# Altium PCB Ikic_PCB.PcbDoc
Units mil, origin at the board's own origin, x right, y up, seen from the top; angles counter-clockwise.
Board outline 7160 x 9700 mil, 2 copper layers (Top Layer, Bottom Layer); 47 components, 36 nets, 175 pads, 22 vias.
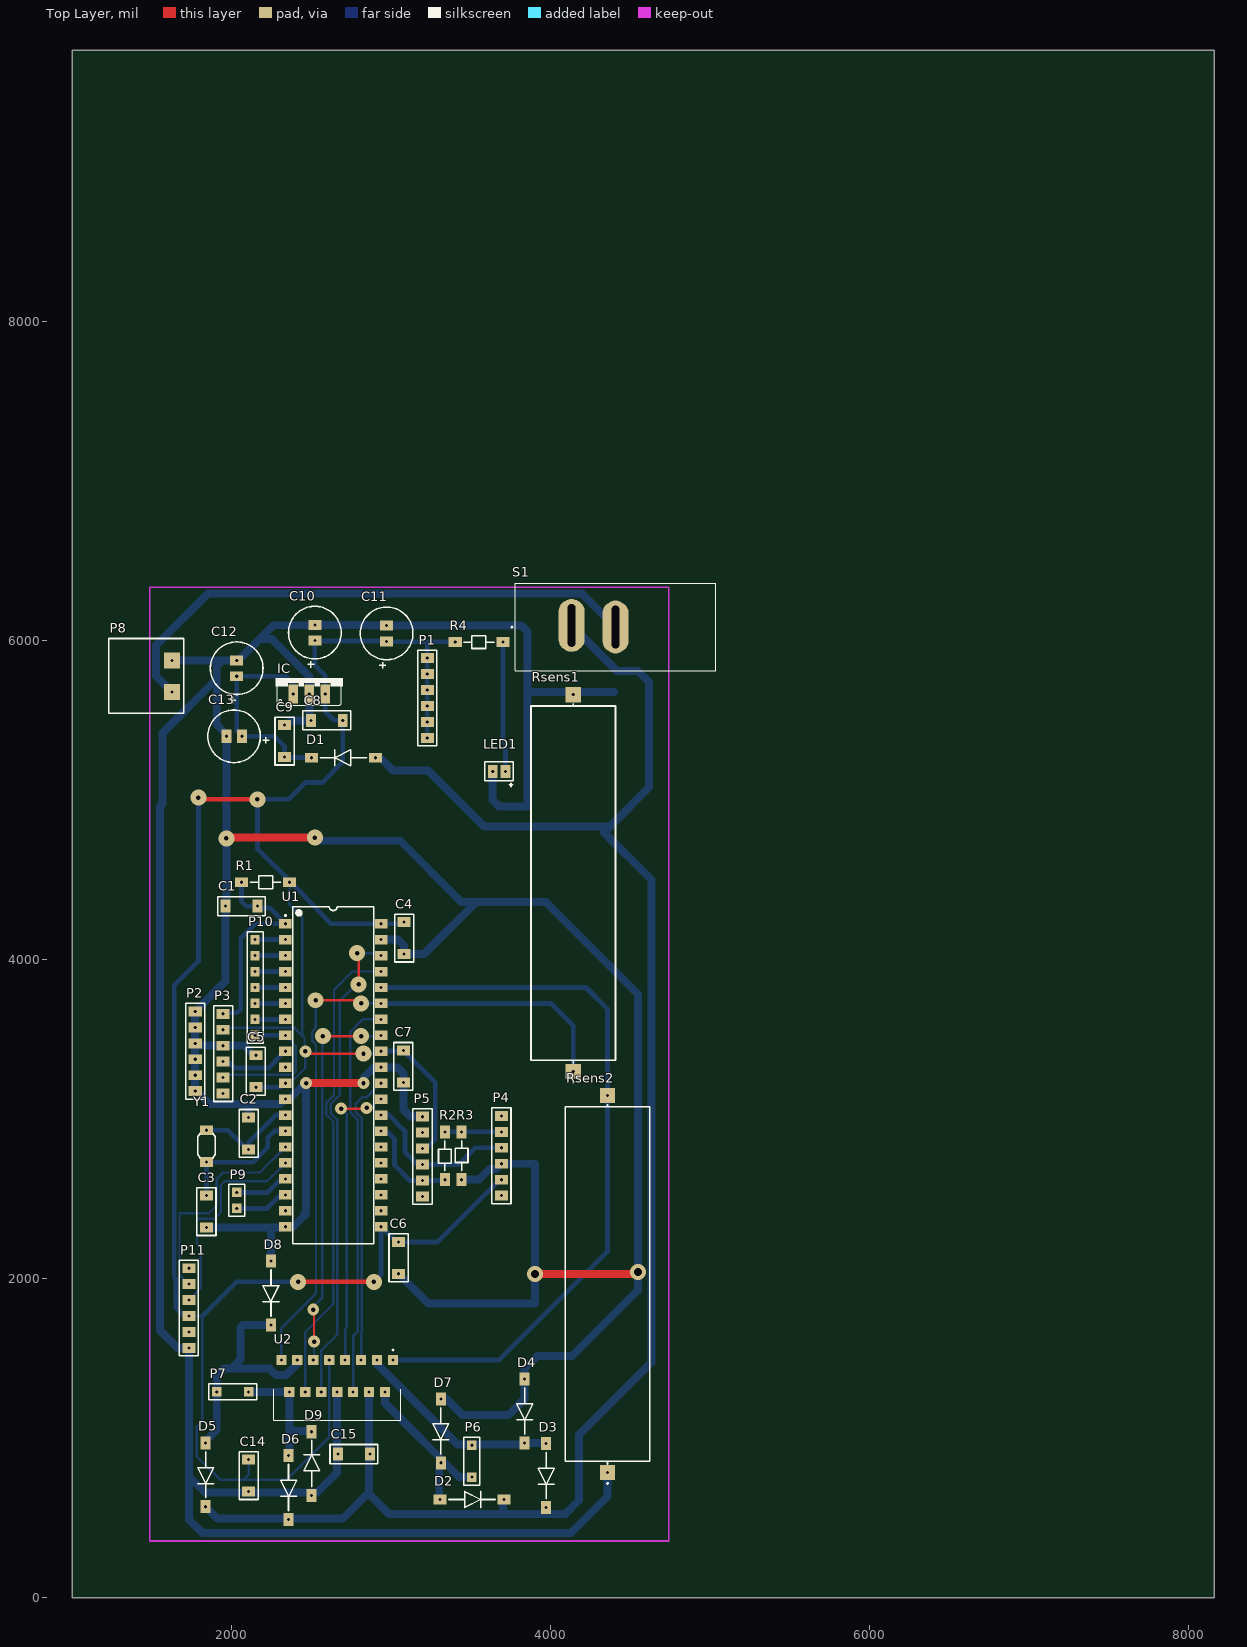
[diagram p0: Top Layer view]
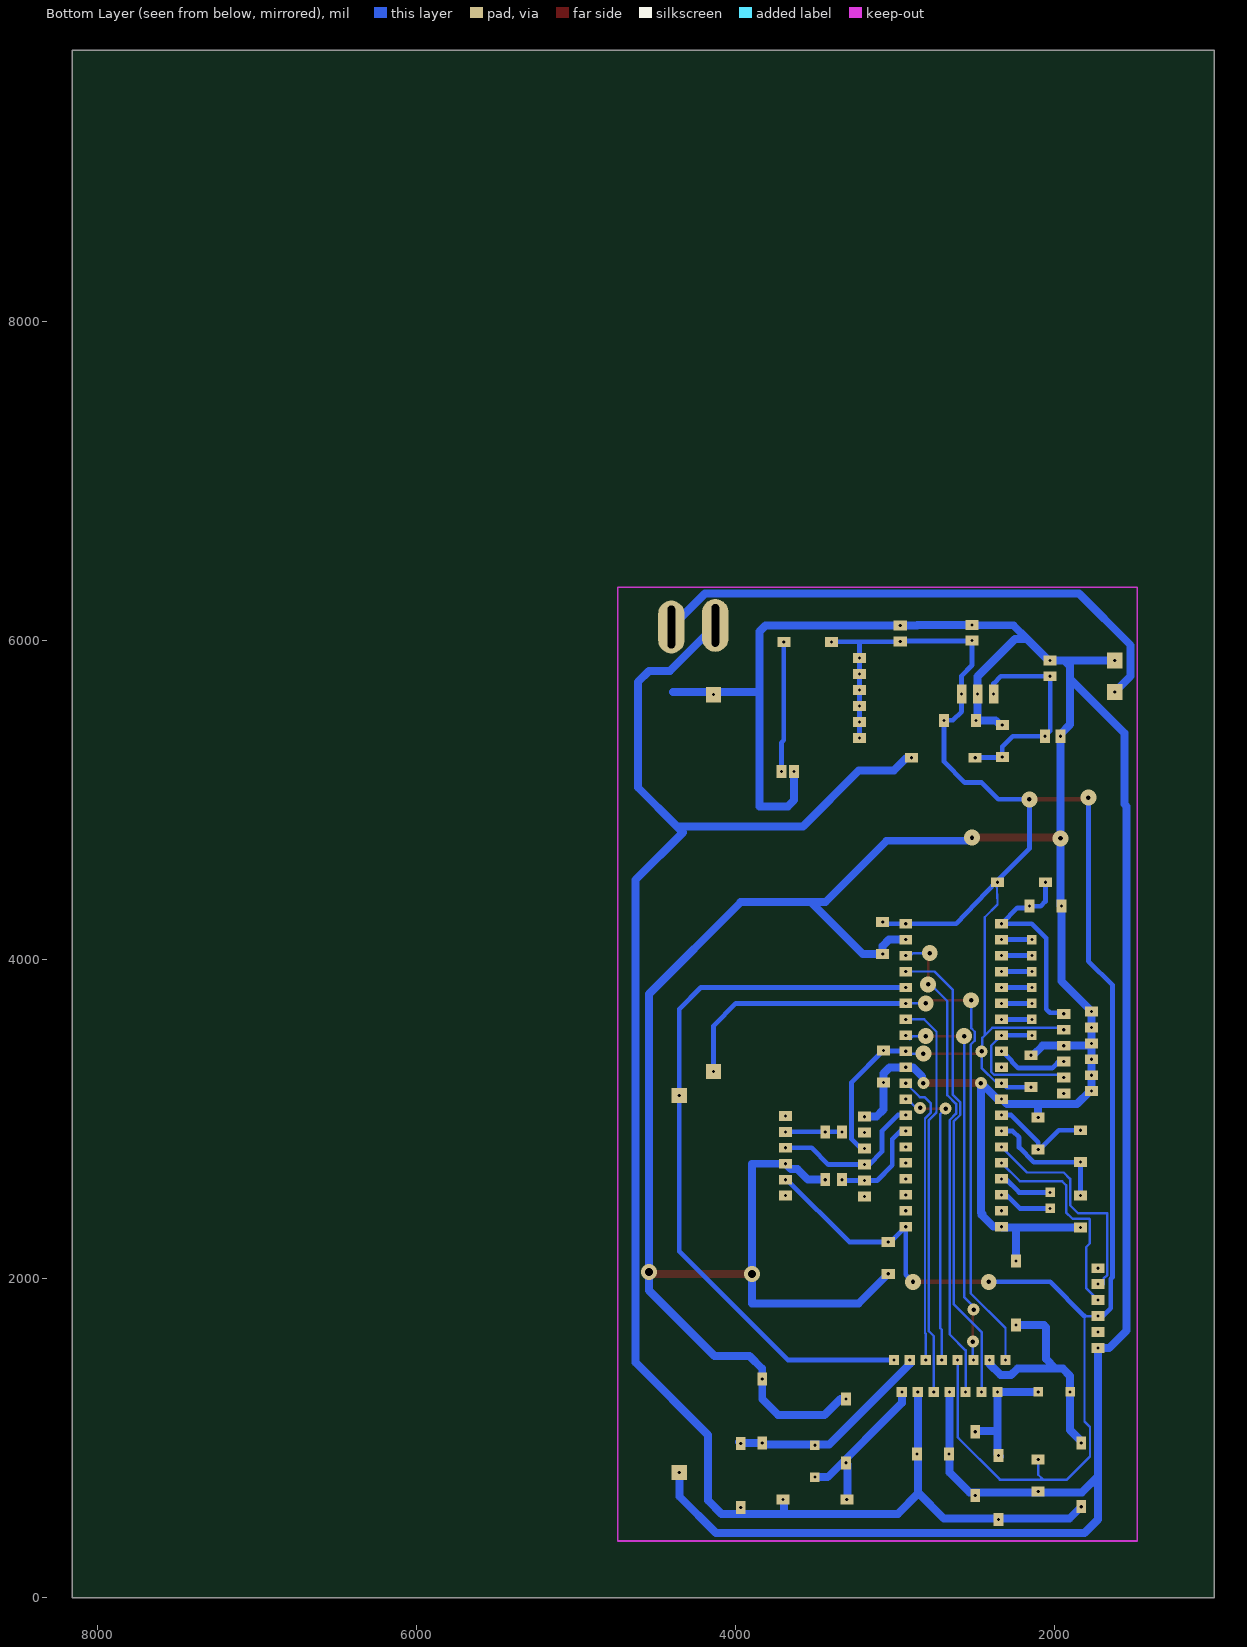
[diagram p1: Bottom Layer view, seen from below]

## Layer stack, top to bottom
Top Solder: solder mask 0.4, Solder Resist, Dk 3.5
Top Layer: signal copper 1.4
Dielectric 1: dielectric 12.6, FR-4, Dk 4.8
Bottom Layer: signal copper 1.4
Bottom Solder: solder mask 0.4, Solder Resist, Dk 3.5

## Board outline
1000,0 8160,0 8160,9700 1000,9700

## Design rules (kind name [scope] priority, off if disabled: settings)
Clearance [All] p1: gap=10 ignorepadtopadclearanceinfootprint=FALSE except(0: Arc-Hole Track-Hole SMDPad-Hole THPad-Hole Via-Hole Fill-Hole Poly-Hole Region-Hole Text-Hole)
PolygonConnect [All] p1: connectstyle=Relief reliefconductorwidth=10 reliefentries=4 polygonreliefangle="90 Angle" airgapwidth=10
RoutingVias [All] p1: holewidth=28 width=50 viastyle="Through Hole" minholewidth=28 minwidth=50 maxholewidth=28 maxwidth=50
SolderMaskExpansion [All] p1: expansion=4
Width Signal [InNetClass('Signal class')] p1: maxlimit=30 minlimit=15 preferedwidth=30 minimp=50.000000 maximp=50.000000 favimp=50.000000
Width Power [InNetClass('Power Class')] p2: maxlimit=55 minlimit=50 preferedwidth=50 bottomlayer_maxwidth=50 minimp=50.000000 maximp=50.000000 favimp=50.000000
30 further rules are at their usual default settings.

## Classes and differential pairs
net class "Signal class": +5 INT0 INT2 MCLR NetC9_2 NetLED1_1 NetP4_5 OSC1 OSC2 PGC PGD PWM1 PWM2 RB0 RB1 RB2 RB3 RB4 RB5 RB9 RB10 RB11 RB12 RF0 RF1 U1ARX U1ATX U2RX U2TX
net class "Power Class": GND NetP8_2 OUT1 OUT2 OUT3 OUT4 VCC

## Components (designator, comment, footprint, x,y, rotation, side; value= is the part's Value field where it differs from the comment)
C1 "Cap" CAP200 1960,4335 r0 top value=100nF
C2 "Cap" CAP200 2105,3010 r270 top value=33pF
C3 "Cap" CAP200 1840,2320 r90 top value=33pF
C4 "Cap" CAP200 3080,4035 r90 top value=100nF
C5 "Cap" CAP200 2150,3400 r270 top value=100nF
C6 "Cap" CAP200 3045,2030 r90 top value=100nF
C7 "Cap" CAP200 3075,3230 r90 top value=100nF
C8 "Cap" CAP200 2495,5500 r0 top value=100nF
C9 "Cap" CAP200 2330,5470 r270 top value=100nF
C10 "Cap Pol1" RAD4 2520,6000 r90 top value=470uF
C11 "Cap Pol1" RAD4 2970,5995 r90 top value=470uF
C12 "Cap Pol1" RAD4 2030,5776.57 r90 top value=470uF
C13 "Cap Pol1" RAD4 2063.43,5400 r180 top value=470uF
C14 "Cap" CAP200 2105,665 r90 top value=100nF
C15 "Cap" CAP200 2665,900 r0 top value=100nF
D1 "Diode 1N4007" DIODE400 2710,5265 r0 top
D2 "Diode 1N5402" DIODE400 3495,615 r180 top
D3 "Diode 1N5402" DIODE400 3970,775 r90 top
D4 "Diode 1N5402" DIODE400 3835,1180 r90 top
D5 "Diode 1N5402" DIODE400 1835,780 r90 top
D6 "Diode 1N5402" DIODE400 2355,700 r90 top
D7 "Diode 1N5402" DIODE400 3310,1055 r90 top
D8 "Diode 1N5402" DIODE400 2245,1920 r90 top
D9 "Diode 1N5402" DIODE400 2500,830 r270 top
IC "L7805" 78XXS 2485,5765 r0 top
LED1 "GREEN" LED_2 3675,5165 r180 top
P1 "5V" HEADER_6 3225,5640 r0 top
P2 "GND" HEADER_6 1770,3425 r0 top
P3 "Programator" HEADER_6 1945,3410 r0 top
P4 "Bluetooth" HEADER_6 3690,2770 r180 top
P5 "FT232" HEADER_6 3195,2765 r180 top
P6 "Motor 1" HDR1X2 3505,755 r0 top
P7 "Motor 2" HDR1X2 1905,1290 r270 top
P8 "2EDGRC-5.08-02P-14-00A(H)" PWR_Con 1465,5760 r180 top
P9 "Interrupt" HDR1X2_1 2030,2540 r180 top
P10 "GPIO" HDR1X7 2145,4125 r270 top
P11 "FT232" HEADER_6 1730,1815 r0 top
R1 "Res1" RES400 2210,4485 r0 top value=10K
R2 "Res1" RES400 3335,2770 r270 top value=4.7K
R3 "Res1" RES400 3440,2770 r90 top value=10K
R4 "Res1" RES400 3550,5990 r180 top value=1K
Rsens1 "15W" Rsens 4140,4480 r90 top value=5
Rsens2 "15W" Rsens 4355,1966.1 r90 top value=5
S1 "" SW_RB141C1100 4405,6085 r180 top
U1 "DSPIC30F4013-20I/P" PDIP600-P40 2635,3275 r0 top
U2 "L298N" TO127P2020X500X2100-15 3010,1490 r270 top
Y1 "XTAL" OSC_5 1840,2845 r0 top

## Footprints (in the part's own frame and the unit in brackets; to place one, negate y for a bottom-side part, rotate by r counter-clockwise, add the part's x,y. Pads: shape width x height; smd on the part's side, far side on the other; paste and mask are expansions set on the pad)
78XXS [mil]
  rect 60x120 hole 19.68: GND(0,-100) IN(-100,-100) OUT(100,-100)
  silkscreen extent -210,-170 210,0
CAP200 [mil]
  rect 62x82 hole 19.68: 1(0,0) 2(200,0)
  silkscreen extent -50,-60 250,60
DIODE400 [mil]
  rect 82x62 hole 19.68: 1(190,0) 2(-210,0)
  silkscreen extent -155,-50 135,50
HDR1X2 [mm]
  rect 1.5x1.5 hole 0.5: 1(0,0) 2(0,5.08)
  silkscreen extent -1.27,-1.27 1.27,6.35
HDR1X2_1 [mm]
  rect 1.5x1.5 hole 0.5: 1(0,0) 2(0,2.54)
  silkscreen extent -1.27,-1.27 1.27,3.81
HDR1X7 [mm] "Connector; Header; 7 Position"
  rect 1.5x1.5 hole 0.5: 1(0,0) 2(2.54,0) 3(5.08,0) 4(7.62,0) 5(10.16,0) 6(12.7,0) 7(15.24,0)
  silkscreen extent -1.27,-1.27 16.51,1.27
HEADER_6 [mil]
  rect 82x62 hole 19.68: 1(0,250) 2(0,150) 3(0,50) 4(0,-50) 5(0,-150) 6(0,-250)
  silkscreen extent -60,-300 60,300
LED_2 [mil]
  rect 62x82 hole 19.68: 1(40,-15) 2(-40,-15)
  silkscreen extent -90,-75 90,80, body extent -105,-126 110,106, height 346
OSC_5 [mil]
  rect 82x62 hole 19.68: 1(0,-115) 2(0,85)
  silkscreen extent -55,-90 55,65, body extent -92,-240 92,207, height 138
PDIP600-P40 [mm] "DIP, 40-Leads, Row Spacing 15.24mm, Pitch 2.54mm, Body 51.8x13.5mm"
  rect 2x1.5 hole 0.5 unplated: 1(-7.62,24.13) 2(-7.62,21.59) 3(-7.62,19.05) 4(-7.62,16.51) 5(-7.62,13.97) 6(-7.62,11.43) 7(-7.62,8.89) 8(-7.62,6.35) 9(-7.62,3.81) 10(-7.62,1.27) 11(-7.62,-1.27) 12(-7.62,-3.81) 13(-7.62,-6.35) 14(-7.62,-8.89) 15(-7.62,-11.43) 16(-7.62,-13.97) 17(-7.62,-16.51) 18(-7.62,-19.05) 19(-7.62,-21.59) 20(-7.62,-24.13) 21(7.62,-24.13) 22(7.62,-21.59) 23(7.62,-19.05) 24(7.62,-16.51) 25(7.62,-13.97) 26(7.62,-11.43) 27(7.62,-8.89) 28(7.62,-6.35) 29(7.62,-3.81) 30(7.62,-1.27) 31(7.62,1.27) 32(7.62,3.81) 33(7.62,6.35) 34(7.62,8.89) 35(7.62,11.43) 36(7.62,13.97) 37(7.62,16.51) 38(7.62,19.05) 39(7.62,21.59) 40(7.62,24.13)
  silkscreen extent -7.74,-26.85 6.45,26.85, body extent -7.3,-26.85 7.3,26.85, height 6.35
PWR_Con [mil]
  rect 100x100 hole 19.68: 1(-160,-115) 2(-160,83)
  silkscreen extent -234,-253 236,217, body extent -239,-256 234,222, height 344
RAD4 [mil]
  rect 62x82 hole 19.68: 1(0,0) 2(98.43,0)
  silkscreen extent -170,-165 215,165
RES400 [mil]
  rect 82x62 hole 19.68: 1(-150,0) 2(150,0)
  silkscreen extent -95,-40 95,40
Rsens [mm]
  rect 2.43x2.43 hole 0.5: A(30,0)
  rect 2.43x2.43 / inner round 2.43 / far side rect 2.43x2.43 hole 0.5: C(-30,0)
  silkscreen extent -31.85,-6.73 28.57,6.73
SW_RB141C1100 [mm]
  oval 4.2x8.4 hole 1.2 slot 6.8 at 90 deg: 1(7,-0.254) 2(0,0)
  silkscreen extent -16,-7 16.6,7, body extent -16.35,-7 16.35,7, height 24.57
TO127P2020X500X2100-15 [mm]
  rect 1.62x1.62 hole 0.5: 1(0,0) 2(5.08,-1.27) 3(0,-2.54) 4(5.08,-3.81) 5(0,-5.08) 6(5.08,-6.35) 7(0,-7.62) 8(5.08,-8.89) 9(0,-10.16) 10(5.08,-11.43) 11(0,-12.7) 12(5.08,-13.97) 13(0,-15.24) 14(5.08,-16.51) 15(0,-17.78)
  silkscreen extent -1.69,-18.99 9.63,1.21

## Part data
C1 C2 C3 C4 C5 C6 C7 C8 C9 C14 C15: "Capacitor", LatestRevisionDate=17-Jul-2002, LatestRevisionNote="Re-released for DXP Platform.", PackageDescription="Radial Cap, Thru-Hole; 2 Leads; 0.3 in Pin Spacing", PackageReference=RAD-0.3, Published=8-Jun-2000, Publisher="Altium Limited"
C10 C11 C12 C13: "Polarized Capacitor (Radial)", LatestRevisionDate=17-Jul-2002, LatestRevisionNote="Re-released for DXP Platform.", PackageDescription="Polarized Capacitor (Radial); 2 Leads", PackageReference=RB7.6-15, Published=8-Jun-2000, Publisher="Altium Limited"
D1: "1 Amp General Purpose Rectifier", Code_JEDEC=DO-204-AL, ComponentLink1Description="Manufacturer Link", ComponentLink1URL=http://www.fairchildsemi.com/, ComponentLink2Description=Datasheet, ComponentLink2URL=http://www.fairchildsemi.com/ds/1N%2F1N4001.pdf, DatasheetVersion=1998, LatestRevisionDate=17-Jul-2002, LatestRevisionNote="Re-released for DXP Platform.", PackageDescription="Diode, Axial; Body 5.2 x 2.7 mm (LxDia. max), Lead Dia. 0.86 mm (max)", PackageReference=DO-41, PackageVersion=Aug-1999, Published=8-Jun-2000, Publisher="Altium Limited"
D2 D3 D4 D5 D6 D7 D8 D9: "3 Amp General Purpose Rectifier", ComponentLink1Description="Manufacturer Link", ComponentLink1URL=http://www.fairchildsemi.com/, ComponentLink2Description=Datasheet, ComponentLink2URL=http://www.fairchildsemi.com/ds/1N%2F1N5400.pdf, DatasheetVersion=1998, LatestRevisionDate=17-Jul-2002, LatestRevisionNote="Re-released for DXP Platform.", PackageDescription="Diode, Axial; Body 9.5 x 5.6 mm (LxDia. max), Lead Dia. 1.32 mm (max)", PackageReference=DO-201AD, PackageVersion=Aug-1999, Published=8-Jun-2000, Publisher="Altium Limited"
IC: "Linear Voltage Regulator IC 1 Output 1.5A D2PAK", Package="TO-263-3 Inchange Semiconductor", Availability=Unavailable, MF=STMicroelectronics, MP=L7805, Price=None, SnapEDA_Link=https://www.snapeda.com/parts/L7805/STMicroelectronics/view-part/563125/?ref=snap
LED1: library part LED1, "Typical RED GaAs LED", LatestRevisionDate=08-Jul-2005, LatestRevisionNote="Mech Layer 1 removed.", PackageDescription="LED; 2 Leads", PackageReference=LED-1, Published=8-Jun-2000, Publisher="Altium Limited"
P1 P2 P3 P4 P5 P11: library part "Header 6", "Header, 6-Pin", LatestRevisionDate=17-Jul-2002, LatestRevisionNote="Re-released for DXP Platform.", Publisher="Altium Limited"
P6 P7 P9: library part "Header 2", "Header, 2-Pin", LatestRevisionDate=17-Jul-2002, LatestRevisionNote="Re-released for DXP Platform.", Publisher="Altium Limited"
P8: library part 00000002, "TERM BLOCK HDR 2POS 90DEG 5.08MM", Manufacturer Part Number=2EDGRC-5.08-02P-14-00A(H), Price=0.1304, Suplier=TME, Suplier Product Link=https://www.tme.eu/en/details/2edgrc5.08-2p14/pluggable-terminal-blocks/degson-electronics/2edgrc-508-02p-14-00ah/
P10: library part "Header 7", "Header, 7-Pin", LatestRevisionDate=17-Jul-2002, LatestRevisionNote="Re-released for DXP Platform.", Publisher="Altium Limited"
R1 R2 R3 R4: "Resistor", LatestRevisionDate=17-Jul-2002, LatestRevisionNote="Re-released for DXP Platform.", PackageDescription="Axial Device, Thru-Hole; 2 Leads; 0.3 in Pin Spacing", PackageReference=AXIAL-0.3, Published=8-Jun-2000, Publisher="Altium Limited"
Rsens1 Rsens2: library part Res1, "Resistor", LatestRevisionDate=17-Jul-2002, LatestRevisionNote="Re-released for DXP Platform.", PackageDescription="Axial Device, Thru-Hole; 2 Leads;", Published=8-Jun-2000, Publisher="Altium Limited"
S1: library part RB141C1100, "Rocker Switches 15A 125VAC, OFF-ON, Black Rocker, No Markings", Package=None, Availability="In Stock", Check_prices=https://www.snapeda.com/parts/RB141C1100/ITC/view-part/?ref=eda, MF="e-switch inc", MP=RB141C1100, Price=None, Purchase-URL=https://pricing.snapeda.com/search/part/RB141C1100/?ref=eda, SnapEDA_Link=https://www.snapeda.com/parts/RB141C1100/ITC/view-part/?ref=snap
U1: "High-Performance 16-bit Digital Signal Controller, 48 KB Flash, 2 KB SRAM, 1 KB EEPROM, 40-Pin PDIP, Industrial Temperature", Supplier Part Number 1=DSPIC30F4013-20IP-ND, ComponentLink1Description=Datasheet, ComponentLink1URL=http://ww1.microchip.com/downloads/en/DeviceDoc/70138F.pdf, ComponentLink2Description="Packaging Specification", ComponentLink2URL=http://www.microchip.com/stellent/groups/techpub_sg/documents/packagingspec/en012702.pdf, ComponentLink3Description="Microchip.com Home", ComponentLink3URL=http://www.microchip.com/, DatasheetVersion="revF, Apr-2008", PackageDescription="40-Lead Plastic Dual In-Line (P) - 600 mil Body [PDIP]", PackageReference=PDIP600-P40, PackageVersion="revBB, Aug-2009", Published=29-Jan-2009, Publisher="Altium Limited", Supplier 1=Digi-Key, Supplier 2=Farnell, Supplier Part Number 2=1439755
U2: "Dual Full Bridge Motor Driver 15-Pin(15+Tab) MULTIWATT V Tube", Package=None, Availability=Unavailable, MP=L298N, Price=None
Y1: "Crystal Oscillator", LatestRevisionDate=17-Jul-2002, LatestRevisionNote="Re-released for DXP Platform.", PackageDescription="Crystal, Thru-Hole; 2 Leads; Body 3.1 x 8.2 mm (Dia.xH)", PackageReference=R38, Published=8-Jun-2000, Publisher="Altium Limited"

## Via types
v1: diameter 100, hole 28, Top Layer to Bottom Layer, 12 vias
v2: diameter 75, hole 28, Top Layer to Bottom Layer, 7 vias
v3: diameter 100, hole 50, Top Layer to Bottom Layer, 2 vias
v4: diameter 100, hole 30, Top Layer to Bottom Layer, 1 vias

## Nets (pads, with @x,y where several pads share a name; then routed paths per layer and width w, separated by ;. In a path a pad name is that pad's centre, name@x,y a point inside that pad or via, vN(x,y) a via of type N, cw(c..) or ccw(c..) an arc to the next point about the centre after c; other vN are vias at no path point)
+5: C4.2 C5.2 C6.2 C7.2 C8.2 C10.1 C11.1 C14.2 IC.OUT P1.1 P1.2 P1.3 P1.4 P1.5 P1.6 P3.2 P4.2 P5.4 P11.4 R1.2 R4.2 U1.11 U1.21 U1.32 U1.40 U2.9 | length 16706.4
  Top Layer w15: v2(2460,3425) 2465,3425 2480,3410 v1(2825,3410)
  Top Layer w30: v1@1820,5005 v1(2160,5005) ; v1(2415,1980) v1(2890,1980)
  Bottom Layer w15: P11.4 1815,1765 1815,1105 1780,1070 1780,885 1925,740 2075,740 ; P3.2 1957.03,3572.03 2392.97,3572.03 2440,3525 ; C14.2 2105,770 2075,740 ; U1.11 2364,3225 2460,3321 v2(2460,3425) 2458.43,3425 2465,3431.57 2455,3441.57 2455,3510 2440,3525 ; R1.2@2365,4490 2364.82,4484.83 2360,4345 2440,4265 2440,3525 ; C10.1 2530,6000 C10.1@2532.5,5997.5 ; U2.9 2610,1329.75 2609.39,1329.14 2609.39,1006.14 2606.5,1003.25 2606.5,1001.59 2344.91,740 2075,740 ; v1(2825,3410) 2920,3410 U1.32 ; C11.1@2967.5,5997.5 C11.1 C11.1@2972.5,5992.5 ; C6.2@3030,2230 C6.2 ; R4.2@3397.5,5992.5 R4.2
  Bottom Layer w30: P11.4 1700,1765 1650,1815 1650,1999.04 1639,2010.04 1639,3840 1790,3991 v1(1790,5015) 1805,5015 v1@1815,5005 ; 1815,1765 2030,1980 v1(2415,1980) ; C5.2 2302.14,3200 2327.14,3225 U1.11 ; C10.1 2520,5845 2585,5780 IC.OUT 2585,5555 2640,5500 C8.2 2695,5240 2565,5110 2460,5110 2355,5005 v1(2160,5005) 2160,4695 2365,4490 2365.09,4489.9 2620,4225 U1.40 3070,4225 C4.2 ; C10.1@2532.5,5997.5 C11.1@2967.5,5997.5 ; v1(2890,1980) 2935,2025 U1.21 C6.2@3030,2230 ; U1.32 2937.5,3427.5 3072.5,3427.5 C7.2 3275,3230 3275,2875 3215,2815 P5.4 ; C11.1@2972.5,5992.5 3225,5992.5 ; C6.2 3290,2230 3680,2620 P4.2 ; P1.6 P1.5 P1.4 P1.3 P1.2 P1.1 3225,5992.5 ; R4.2@3397.5,5992.5 3225,5992.5
GND: C1.1 C2.1 C3.1 C4.1 C5.1 C6.1 C7.1 C8.1 C9.1 C10.2 C11.2 C12.2 C13.2 C14.1 C15.1 D4.1 D7.1 D8.1 D9.1 IC.GND LED1.1 P2.1 P2.2 P2.3 P2.4 P2.5 P2.6 P3.3 P4.3 P5.6 P8.1 P11.6 R3.1 Rsens1.A Rsens2.C U1.12 U1.20 U1.31 U1.39 U2.8 | length 32304.8
  Top Layer w50: v4(1965,4760) 1970,4765 v1(2520,4765) ; v2(2465,3225) 2465,3215 2475,3225 v2(2825,3225) ; v3(3900,2030) 4520,2030 4530,2040 v3(4545,2040)
  Bottom Layer w50: P8.1 1940,5875 ; C3.1 2245,2320 ; C1.1 1960,3865 1782.3,3687.3 1782.3,3680.54 1776.75,3675 P2.1 P2.2 P2.3 ; C1.1@1965,4340 v4(1965,4760) C13.2 1965,5413.25 1905,5473.25 1905,5760 ; C2.1 2105,3094 ; C5.1 2136.75,3400 2076.75,3460 P3.3 1798.25,3460 1783.25,3475 P2.3 ; D8.1 2245,2320 ; C9.1 2343.25,5470 2373.25,5500 C8.1 2495,5513.25 2485,5523.25 IC.GND 2485,5775 2250,6010 2175,6010 ; C10.2@2499.19,6096.1 2261.1,6096.1 2175,6010 ; C10.2@2499.22,6096.13 C10.2@2517.65,6096.13 ; v1(2520,4765) 2540,4745 3055,4745 3440,4360 3530,4360 ; C10.2 2521.71,6096.71 2863.29,6096.71 2865,6095 2920,6095 ; U2.8 2660,785 2535,660 1830,660 1730,760 ; 2832.5,3267.5 2890,3325 U1.31 2936.73,3323.27 3037.44,3323.27 3075,3285.71 C7.1 3075,3060 3120,3015 P5.6 ; U1.39 3040,4125 3080,4085 C4.1 3205,4035 3530,4360 ; C11.2 3463.43,6093.43 3465,6095 3815,6095 3852.32,6057.68 3852.32,5660 ; C6.1 3230,1845 3900,1845 v3(3900,2030) 3900,2720 P4.3 3656,2686 3614,2686 3548,2620 R3.1 ; D7.1 3345,1245 3445,1145 3735,1145 3835,1245 D4.1 3835,1435 3914.13,1514.13 4134.13,1514.13 4545,1925 v3(4545,2040) 4545,3785 3970,4360 3530,4360 ; LED1.1@3630,5185 LED1.1 3635,5000 3675,4960 3852.32,4960 3852.32,5660 ; Rsens2.C 4355,635 4125,405 1815,405 1730,490 1730,760 ; 4395,5676.1 3868.43,5676.1 3852.32,5660 ; 1730,760 P11.6 1660,1565 1550,1675 1550,4960.15 1565,4975.15 1565,5420 1905,5760 ; P2.3 P2.4 P2.5 P2.6 1780,3175 1861,3094 2105,3094 ; 1905,5760 1905,5840 1940,5875 ; 1940,5875 C12.2 2040,5875 2175,6010 ; 2105,3094 2301.55,3094 2332.55,3125 U1.12 2360,3125 2460,3225 v2(2465,3225) 2465,2415 2455,2405 2460,2400 2385,2325 U1.20 2332.55,2325 2327.55,2320 2245,2320
INT0: P9.1 U1.17 | length 340.2
  Bottom Layer w30: P9.1 2225,2540 2310,2625 U1.17
INT2: P9.2 U1.18 | length 340.2
  Bottom Layer w30: P9.2 2220,2440 2305,2525 U1.18
MCLR: C1.2 P3.1 R1.1 U1.1 | length 1337.7
  Bottom Layer w30: P3.1 1951,3666 2031,3666 2055,3690 2055,4135 2145,4225 U1.1 2236,4324 2171,4324 C1.2 2090,4335 2060,4365 R1.1
NetC9_2: C9.2 C12.1 C13.1 D1.2 IC.IN | length 1360.3
  Bottom Layer w15: C12.1@2030,5773.86 C12.1
  Bottom Layer w30: C12.1@2030,5773.86 2030,5433.43 C13.1 2265,5400 2330,5335 C9.2 2332.5,5267.5 2497.5,5267.5 D1.2 ; C12.1 2338.43,5776.57 2385,5730 IC.IN
NetLED1_1: LED1.2 R4.1 | length 816.2
  Bottom Layer w30: R4.1 3700,5375 3715,5360 LED1.2
NetP4_5: P4.5 R2.1 R3.2 | length 355
  Bottom Layer w30: R2.1 R3.2 P4.5
NetP8_2: P8.2 S1.2 | length 3436
  Bottom Layer w50: P8.2 1525,5777 1525,5970 1850,6295 4193.43,6295 4403.43,6085 S1.2
OSC1: C2.2 U1.13 Y1.2 | length 660.1
  Bottom Layer w30: Y1.2 1975,2930 2095,2810 C2.2 2105,2855 2275,3025 U1.13
OSC2: C3.2 U1.14 Y1.1 | length 822.3
  Bottom Layer w30: C3.2 Y1.1 2132.36,2730 2225,2822.64 2225,2885 2265,2925 U1.14
OUT1: D2.1 D7.2 P6.1 U2.2 | length 1041.8
  Bottom Layer w50: U2.2 2960,1220 3425,755 P6.1 ; D2.1@3300,615 3300,835 D7.2
OUT2: D3.1 D4.2 P6.2 U2.3 | length 1310.4
  Bottom Layer w50: U2.3 2910,1465 3415,960 3825,960 D4.2 3975,970 D3.1@3980,975
OUT3: D5.1 D8.2 P7.1 U2.13 | length 1521.3
  Bottom Layer w50: D5.1@1830,975 1905,1050 P7.1 1905,1390 1950,1435 1995,1435 ; D8.2 2070,1710 2055,1695 2055,1495 1995,1435 ; U2.13 2410,1465 2340,1395 2275,1395 2235,1435 1995,1435
OUT4: D6.1 D9.2 P7.2 U2.14 | length 808.3
  Bottom Layer w50: P7.2 U2.14 2360,1045 ; D6.1@2345,885 2360,900 2360,1045 ; D9.2 2495,1045 2360,1045
PGC: P3.5 P10.7 U1.8 | length 915.6
  Bottom Layer w15: P3.5 1962.97,3277.97 2381.62,3277.97 2400,3296.35 2400,3460 U1.8
  Bottom Layer w30: P10.7 U1.8
PGD: P3.4 U1.9 | length 452.6
  Bottom Layer w30: P3.4 1951.12,3353.88 1983.75,3353.88 2017.63,3320 2230,3320 2270.63,3360.63 2270.63,3364.88 2330.75,3425 U1.9
PWM1: U1.34 U2.6 | length 2514.5
  Bottom Layer w15: U2.6 2760,1640 2790,1670 2790,2994.19 2749.82,3034.36 2745,3039.19 2745,3040.36 2742.5,3042.86 2742.5,3547.96 2819.54,3625 U1.34
PWM2: U1.33 U2.11 | length 2442.6
  Top Layer w15: v2(2510,1805) 2515,1800 v2(2515,1605) ; v1(2570,3520) v1(2810,3520)
  Bottom Layer w15: U2.11 2515,1495 v2(2515,1605) ; v2(2510,1805) 2510,1825 2567.5,1882.5 2567.5,3517.5 v1(2570,3520) ; v1(2810,3520) 2890,3520 2910,3500 U1.33
RB0: P10.1 U1.2 | length 190
  Bottom Layer w30: P10.1 U1.2
RB1: P10.2 U1.3 | length 190
  Bottom Layer w30: P10.2 U1.3
RB2: P10.3 U1.4 | length 190
  Bottom Layer w30: P10.3 U1.4
RB3: P10.4 U1.5 | length 190
  Bottom Layer w30: P10.4 U1.5
RB4: P10.5 U1.6 | length 190
  Bottom Layer w30: P10.5 U1.6
RB5: P10.6 U1.7 | length 190
  Bottom Layer w30: P10.6 U1.7
RB9: U1.38 U2.10 | length 3061.8
  Top Layer w15: v1(2785,4040) 2795,4030 v1(2795,3845)
  Bottom Layer w15: U2.10 2560,1550 2660,1650 2660,2994.54 2620,3034.54 2620,3095.46 2675,3150.46 2675,3739.64 2780.36,3845 v1(2795,3845) ; v1(2785,4040) 2890,4040 2920,4010 U1.38
RB10: U1.37 U2.12 | length 2972.4
  Bottom Layer w15: U2.12 2460,1665 2635,1840 2635,2984.19 2592.5,3026.69 2592.5,3103.31 2640,3150.81 2640,3810 2755,3925 U1.37
RB11: Rsens2.A U1.36 U2.1 | length 4622.6
  Bottom Layer w30: U1.36 4220,3825 4355,3690 Rsens2.A 4355,2170 3675,1490 U2.1
RB12: Rsens1.C U1.35 U2.15 | length 4339.2
  Top Layer w15: v1(2525,3745) 2790,3745 v1(2810,3725)
  Bottom Layer w15: U2.15 2310,1690 2527.5,1907.5 2527.5,3467.04 2502.5,3492.04 2502.5,3547.96 2525,3570.46 v1(2525,3745) ; v1(2810,3725) U1.35
  Bottom Layer w30: U1.35 4000,3725 4140,3585 Rsens1.C Rsens1.C@4135,3303.9
RF0: U1.30 U2.5 | length 1835.7
  Bottom Layer w15: U2.5 2810,1654.64 2815,1659.64 2815,3004.54 2777.5,3042.04 2777.5,3097.96 2817.04,3137.5 2847.5,3137.5 U1.30
RF1: U1.29 U2.7 | length 1888.5
  Top Layer w15: v2(2685,3065) 2855,3065 2850,3070 v2(2845,3070)
  Bottom Layer w15: v2(2685,3065) 2720,3030 2720,1690 2710,1680 U2.7 ; v2(2845,3070) 2870,3070 2925,3125 U1.29
U1ARX: P11.3 U1.16 | length 1346.8
  Bottom Layer w15: P11.3 1805,1940 1805,2196.5 1781.5,2220 1781.5,2371.5 1785,2375 1890,2375 1930,2415 1930,2585 1955,2610 2220,2610 U1.16
U1ATX: P11.2 U1.15 | length 1421.8
  Bottom Layer w15: P11.2 1695,1965 1695,2000 1671.5,2023.5 1671.5,2410 1855,2410 1905,2460 1905,2625 1945,2665 2175,2665 U1.15
U2RX: P4.4 P5.3 U1.28 | length 1003.1
  Bottom Layer w30: U1.28 2985,3025 3085,2925 3085,2795 3165,2715 P5.3 3420,2715 3525,2820 P4.4
U2TX: P5.2 R2.2 U1.27 | length 627.1
  Bottom Layer w30: U1.27 2970,2925 3020,2875 3020,2710 3115,2615 P5.2 3330,2615 R2.2
VCC: C15.2 D1.1 D2.2 D3.2 D5.2 D6.2 S1.1 U2.4 | length 11085.6
  Bottom Layer w50: D5.2@1830,575 D5.2 1910,495 2695,495 2855,655 ; U2.4 2860,660 2855,655 ; D1.1 2930,5265 3010,5185 3230,5185 3580,4835 4370,4835 ; D2.2@3700,585 3700,525 ; S1.1@4145,6095 S1.1 4414.41,5810 4545,5810 4615,5740 4615,5080 4370,4835 ; 2855,655 2985,525 3700,525 ; 3700,525 4090,525 4175,610 4175,1020 4630,1475 4630,4500 4332.5,4797.5 4370,4835
pads on no net: P3.6 P4.1 P4.6 P5.1 P5.5 P11.1 P11.5 U1.10 U1.19 U1.22 U1.23 U1.24 U1.25 U1.26

## Keep-outs
Keep-Out Layer:
  lines w10: 1485,355 4569.61,355 4740,355 4740,6335 1485,6335 1485,355

## Text inside footprints (layer, text, board x,y; h text height)
IC: Mechanical 13 "O" at 2560.06,5614.88 h50.04; Mechanical 13 "I" at 2359.84,5614.81 h50.06; Mechanical 13 "-" at 2459.99,5614.92 h50.03